# Altium PCB PCB_4_Sensores.PcbDoc
Units mm, origin at the board's own origin, x right, y up, seen from the top; angles counter-clockwise.
Board outline 47 x 141 mm, 2 copper layers (Top Layer, Bottom Layer); 4 components, 78 nets, 74 pads, 37 vias.
Unrouted connection lines stored in the file: 4.
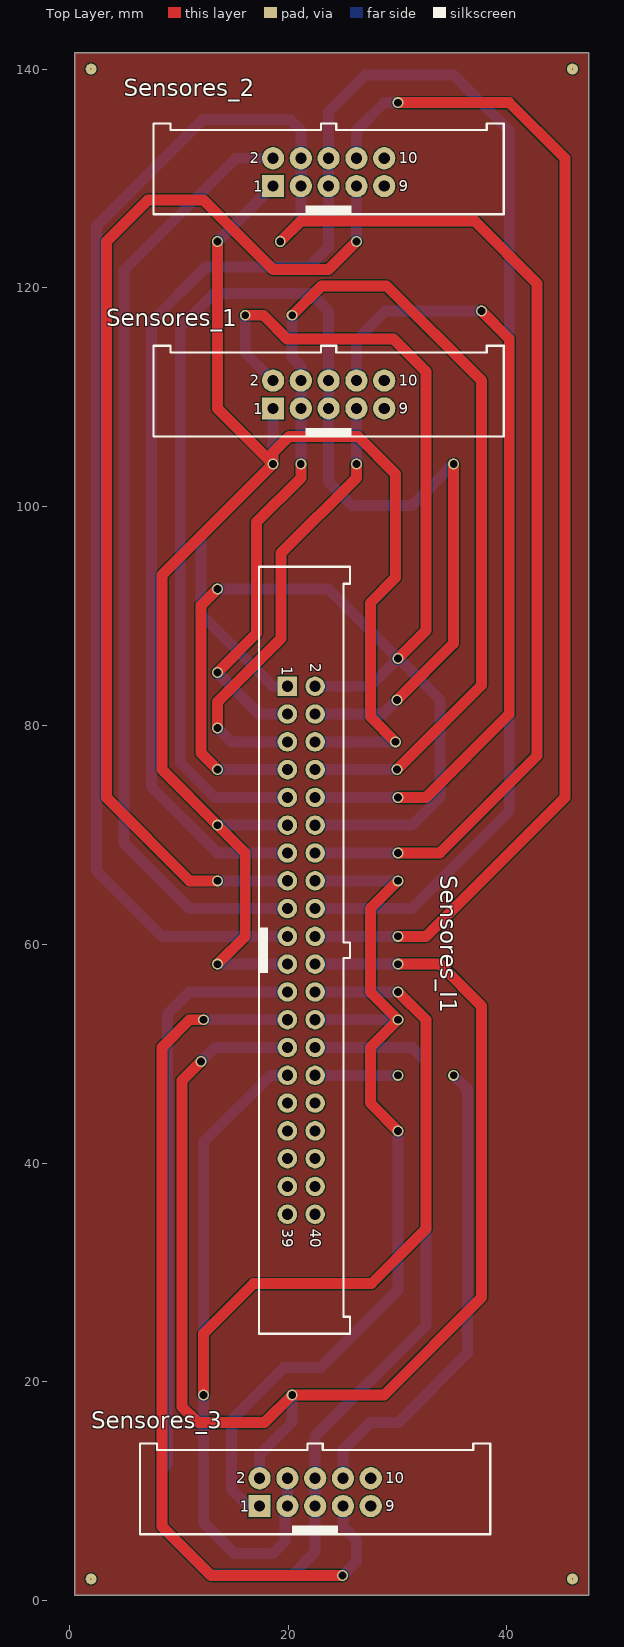
[diagram p0: Top Layer view]
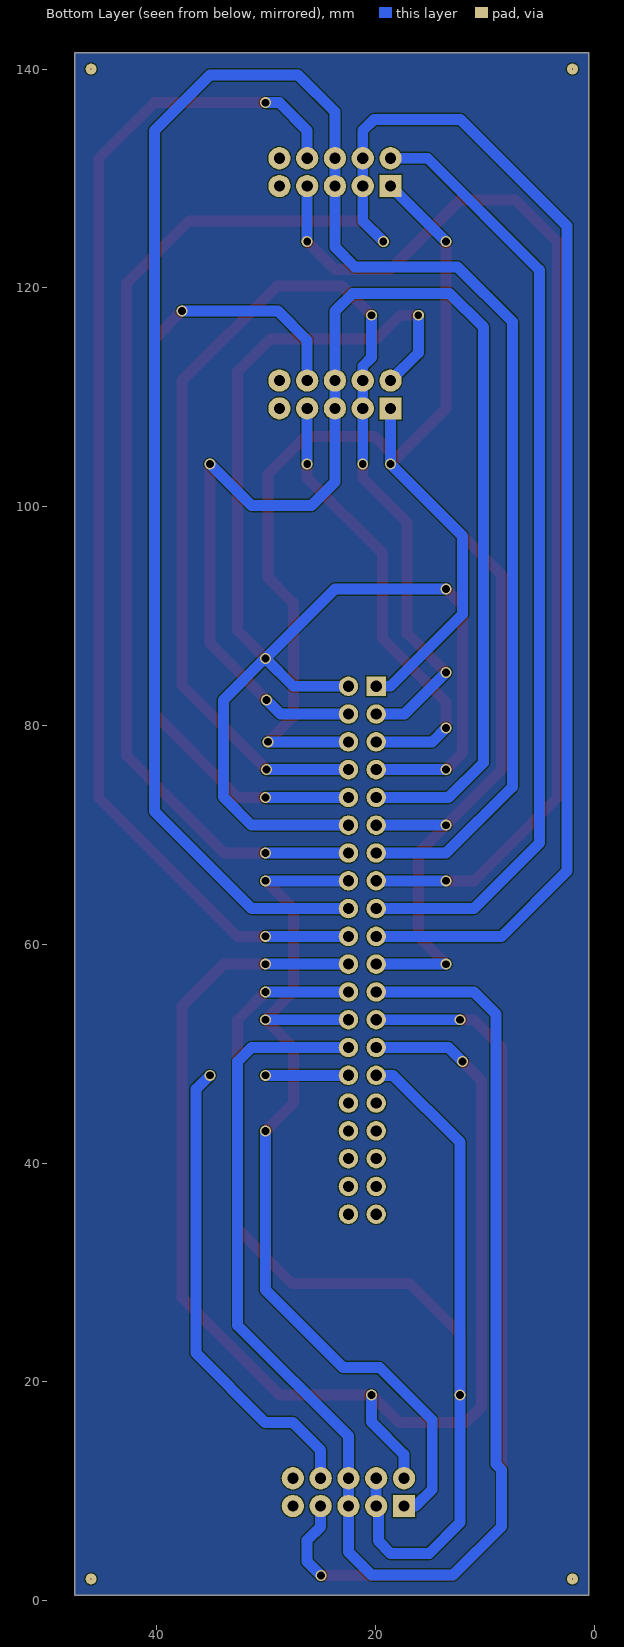
[diagram p1: Bottom Layer view, seen from below]
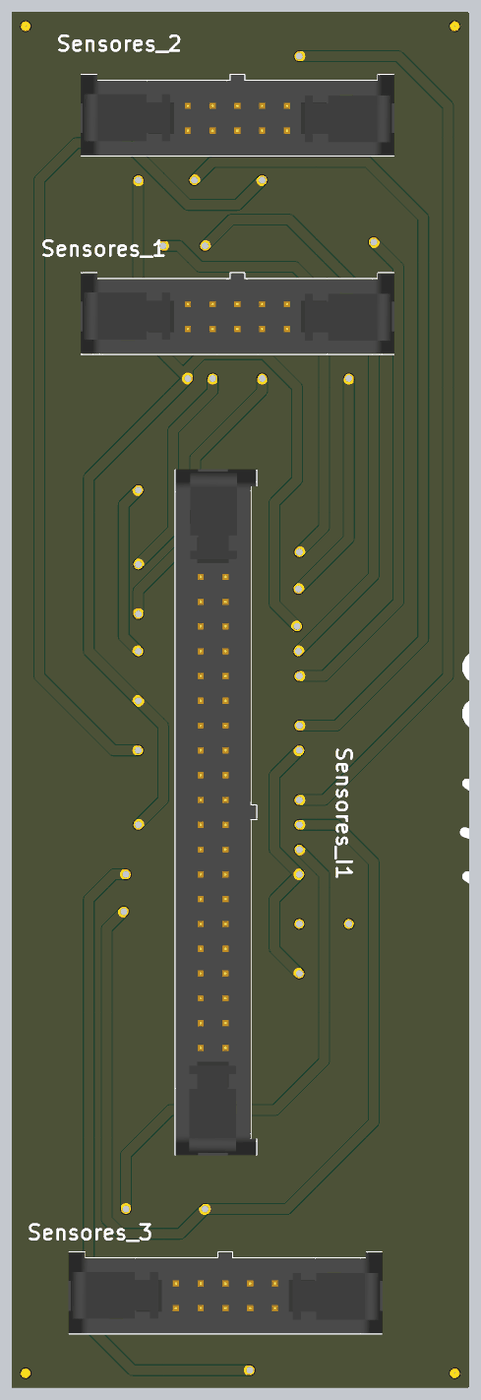
[diagram p2: 3D render of the assembled board from above, using the file's embedded part models]

## Layer stack, top to bottom
Top Solder: solder mask 0.0102, Solder Resist, Dk 3.5
Top Layer: signal copper 0.0356
Dielectric 1: dielectric 0.32, FR-4, Dk 4.8
Bottom Layer: signal copper 0.0356
Bottom Solder: solder mask 0.0102, Solder Resist, Dk 3.5

## Board outline
47.5,141.5 47.5,0.5 0.5,0.5 0.5,141.5

## Design rules (kind name [scope] priority, off if disabled: settings)
Clearance [All] p1: gap=0.254 ignorepadtopadclearanceinfootprint=FALSE except(0: Arc-Hole Track-Hole SMDPad-Hole THPad-Hole Via-Hole Fill-Hole Poly-Hole Region-Hole Text-Hole; 0.1: Arc-Fill Arc-Poly Arc-Region Track-Fill Track-Poly Track-Region SMDPad-Fill SMDPad-Poly SMDPad-Region THPad-Fill THPad-Poly THPad-Region Via-Fill Via-Poly Via-Region Fill-Fill Fill-Poly Fill-Region Poly-Poly Poly-Region Region-Region)
ParallelSegment [All] p1: limit=800.217 gap=0.25
PlaneClearance [All] p1: clearance=0.01
PolygonConnect [All] p1: connectstyle=Relief reliefconductorwidth=0.254 reliefentries=4 polygonreliefangle="90 Angle" airgapwidth=0.254
RoutingCorners [All] p1: cornerstyle=45-Degree minsetback=5.08 maxsetback=2.54
RoutingPriority [OnLayer('Bottom Layer')] p1: routingpriority=6
RoutingVias [All] p1: holewidth=0.711 width=1.57 viastyle="Through Hole" minholewidth=0.5 minwidth=1 maxholewidth=0.711 maxwidth=1.67
SolderMaskExpansion [All] p1: expansion=0.102
UnRoutedNet [All] p1: checkbadconnections=TRUE
Width "Schematic Width Constraint_9" [InNet('GND_8V')] p1: maxlimit=1.27 minlimit=1.27 preferedwidth=1.27
Width "Schematic Width Constraint_7" [InNet('Servo_5')] p2: maxlimit=0.762 minlimit=0.762 preferedwidth=0.762
Width "Schematic Width Constraint_6" [InNet('Servo_7')] p3: maxlimit=0.762 minlimit=0.762 preferedwidth=0.762
Width "Schematic Width Constraint_5" [InNet('Servo_8')] p4: maxlimit=0.762 minlimit=0.762 preferedwidth=0.762
Width "Schematic Width Constraint_4" [InNet('Servo_6')] p5: maxlimit=0.762 minlimit=0.762 preferedwidth=0.762
Width "Schematic Width Constraint_3" [InNet('Servo_2')] p6: maxlimit=0.762 minlimit=0.762 preferedwidth=0.762
Width "Schematic Width Constraint_2" [InNet('Servo_4')] p7: maxlimit=0.762 minlimit=0.762 preferedwidth=0.762
Width "Schematic Width Constraint_1" [InNet('Servo_3')] p8: maxlimit=0.762 minlimit=0.762 preferedwidth=0.762
Width "Schematic Width Constraint_8" [InNet('Servo_1')] p9: maxlimit=0.762 minlimit=0.762 preferedwidth=0.762
Width "Schematic Width Constraint" [InNet('VCC_8V')] p10: maxlimit=1.524 minlimit=1.27 preferedwidth=1.524
Width [All] p11: maxlimit=1 minlimit=0.2 preferedwidth=1 minimp=50.000000 maximp=50.000000 favimp=50.000000
26 further rules are at their usual default settings.

## Components (designator, comment, footprint, x,y, rotation, side; value= is the part's Value field where it differs from the comment)
Sensores_1 "61201022021" 61201022021 23.71,110.26 r0 top
Sensores_2 "61201022021" 61201022021 23.71,130.58 r0 top
Sensores_3 "61201022021" 61201022021 22.48,9.93 r0 top
Sensores_I1 "61204022021" 61204022021 21.21,59.46 r270 top

## Footprints (in the part's own frame and the unit in brackets; to place one, negate y for a bottom-side part, rotate by r counter-clockwise, add the part's x,y. Pads: shape width x height; smd on the part's side, far side on the other; paste and mask are expansions set on the pad)
61201022021 [mil] "10 pins, straight, short lever, gold plating"
  rect 80x80 hole 40.16: 1(-200,-50)
  round 80 hole 40.16: 2(-200,50) 3(-100,-50) 4(-100,50) 5(0,-50) 6(0,50) 7(100,-50) 8(100,50) 9(200,-50) 10(200,50)
  silkscreen extent -630,-152 630,175, body extent -634,-152 634,175, height 967
61204022021 [mil] "40 pins, straight, short lever, gold plating"
  rect 70x70 hole 40.16: 1(-950,-50)
  round 70 hole 40.16: 2(-950,50) 3(-850,-50) 4(-850,50) 5(-750,-50) 6(-750,50) 7(-650,-50) 8(-650,50) 9(-550,-50) 10(-550,50) 11(-450,-50) 12(-450,50) 13(-350,-50) 14(-350,50) 15(-250,-50) 16(-250,50) 17(-150,-50) 18(-150,50) 19(-50,-50) 20(-50,50) 21(50,-50) 22(50,50) 23(150,-50) 24(150,50) 25(250,-50) 26(250,50) 27(350,-50) 28(350,50) 29(450,-50) 30(450,50) 31(550,-50) 32(550,50) 33(650,-50) 34(650,50) 35(750,-50) 36(750,50) 37(850,-50) 38(850,50) 39(950,-50) 40(950,50)
  silkscreen extent -1380,-152 1380,175, body extent -1384,-152 1384,175, height 967

## Part data
Sensores_1 Sensores_2 Sensores_3: "Male Box Header WR-BHD with lever, THT, Vertical, pitch 2.54 mm, 10 pins", Contact Resistance="20 mOhm", Operating Temperature="-40 to 125 degC", Withstanding Voltage="500 VAC", Working Voltage="250 VAC", ComponentLink1Description=Manufacturer, ComponentLink1URL=http://www.we-online.de, ComponentLink2Description=Datasheet, ComponentLink2URL=https://katalog.we-online.de/em/datasheet/6120xx22021.pdf, Gender=Male, Mounting Technology=THT, Orientation=Vertical, Packaging=Tray, Part Number=61201022021, Pin Number=10, Pitch="2.54 mm", Published Date="August 2018", Publisher="Wurth Elektronik"
Sensores_I1: "Male Box Header WR-BHD with lever, THT, Vertical, pitch 2.54 mm, 40 pins", Contact Resistance="20 mOhm", Operating Temperature="-40 to 125 degC", Withstanding Voltage="500 VAC", Working Voltage="250 VAC", ComponentLink1Description=Manufacturer, ComponentLink1URL=http://www.we-online.de, ComponentLink2Description=Datasheet, ComponentLink2URL=https://katalog.we-online.de/em/datasheet/6120xx22021.pdf, Gender=Male, Mounting Technology=THT, Orientation=Vertical, Packaging=Tray, Part Number=61204022021, Pin Number=40, Pitch="2.54 mm", Published Date="August 2018", Publisher="Wurth Elektronik"

## Free pads (board coordinates)
  round 1 hole 0.1: 1(2,2) 1(2,140) 1(46,2) 1(46,140)

## Via types
v1: diameter 1, hole 0.711, Top Layer to Bottom Layer, 37 vias

## Nets (pads, with @x,y where several pads share a name; then routed paths per layer and width w, separated by ;. In a path a pad name is that pad's centre, name@x,y a point inside that pad or via, vN(x,y) a via of type N, cw(c..) or ccw(c..) an arc to the next point about the centre after c; other vN are vias at no path point)
3V3_uC: 
"ADD 1": Sensores_1.7 Sensores_I1.5 | length 41.3
  Top Layer w1: v1(13.55,79.78) 13.55,82.14 19.37,87.96 19.37,95.76 26.25,102.64 v1(26.25,103.91)
  Bottom Layer w1: v1(13.55,79.78) 14.82,78.51 Sensores_I1.5@19.9,78.51 ; v1(26.25,103.91) Sensores_1.7
"ADD 2": Sensores_1.8 Sensores_I1.10 | length 75
  Top Layer w1: v1(30.06,73.43) 32.6,73.43 40.22,81.05 40.22,115.34 v1(37.68,117.88)
  Bottom Layer w1: Sensores_I1.10@22.44,73.43 v1(30.06,73.43) ; Sensores_1.8 26.25,115.213 28.917,117.88 v1(37.68,117.88)
"ADD 3": Sensores_2.7 Sensores_I1.15 | length 103.7
  Top Layer w1: v1(13.55,65.81) 11.01,65.81 3.39,73.43 3.39,124.23 7.2,128.04 12.28,128.04 18.63,121.69 23.71,121.69 v1(26.25,124.23)
  Bottom Layer w1: v1(13.55,65.81) Sensores_I1.15 ; v1(26.25,124.23) Sensores_2.7
"ADD 4": Sensores_2.8 Sensores_I1.20 | length 111.2
  Top Layer w1: v1(30.06,60.73) 32.6,60.73 45.3,73.43 45.3,131.85 40.22,136.93 v1(30.06,136.93)
  Bottom Layer w1: Sensores_I1.20 v1(30.06,60.73) ; Sensores_2.8 26.25,134.39 28.79,136.93 v1(30.06,136.93)
"ADD 5": Sensores_3.7 Sensores_I1.25 | length 82
  Top Layer w1: v1(12.28,53.11) 11.01,53.11 8.47,50.57 8.47,6.795 12.955,2.31 v1(24.98,2.31)
  Bottom Layer w1: v1(12.28,53.11) Sensores_I1.25@19.899,53.11 ; Sensores_I1.25 Sensores_I1.25 ; v1(24.98,2.31) 26.25,3.58 26.25,5.53 25.02,6.76 Sensores_3.7
"ADD 6": Sensores_3.8 Sensores_I1.30 | length 51.2
  Bottom Layer w1: Sensores_I1.30@22.44,48.03 Sensores_I1.30 v1(30.06,48.03) ; Sensores_3.8 25.02,13.78 27.55,16.31 30.09,16.31 36.41,22.63 36.41,46.76 v1(35.14,48.03)
DBG0: 
DBG1: 
DBG2: 
"GND (SENSOR)": Sensores_1.2 Sensores_2.2 Sensores_3.2 Sensores_I1.2 Sensores_I1.7 Sensores_I1.12 Sensores_I1.17 Sensores_I1.22 Sensores_I1.27 | length 344.9
  Top Layer w1: v1(12.051,49.3) 10.318,47.566 10.318,17.727 11.765,16.28 17.84,16.28 v1(20.38,18.82) 28.79,18.82 37.68,27.71 37.68,54.38 33.87,58.19 v1(30.06,58.19) ; v1(13.55,75.97) 13.55,75.989 12.05,77.489 12.05,90.98 v1(13.55,92.48) ; v1(16.09,117.5) 17.74,117.5 19.9,115.34 29.63,115.34 32.6,112.37 32.6,88.67 v1(30.06,86.13)
  Bottom Layer w1: v1(12.051,49.3) 13.321,50.57 Sensores_I1.27@19.899,50.57 ; v1(13.55,75.97) Sensores_I1.7@19.899,75.97 ; v1(13.55,92.48) 23.71,92.48 v1(30.06,86.13) ; v1(16.09,117.5) 16.09,114.07 Sensores_1.2 ; Sensores_3.2 17.4,13.35 20.38,16.33 v1(20.38,18.82) ; Sensores_2.2 15.23,131.85 5,121.62 5,69.28 11.01,63.27 Sensores_I1.17 ; Sensores_I1.27 Sensores_I1.27 ; Sensores_I1.7 Sensores_I1.7 ; Sensores_I1.22 v1(30.06,58.19) ; Sensores_I1.12 31.33,70.89 33.91,73.47 33.91,82.345 30.125,86.13 v1(30.06,86.13) ; Sensores_I1.2 27.52,83.59 v1(30.06,86.13)
GND_8V: 
GND_uC: 
I2C1-SCL: Sensores_1.3 Sensores_1.4 Sensores_I1.3 Sensores_I1.8 | length 112.3
  Top Layer w1: v1(13.55,84.86) 17.12,88.43 17.12,98.59 21.17,102.64 v1(21.17,103.91) ; v1(20.38,117.5) 23.07,120.19 29.02,120.19 37.68,111.53 37.68,83.681 v1(29.969,75.97)
  Bottom Layer w1: v1(13.55,84.86) 17.36,81.05 Sensores_I1.3@19.9,81.05 ; v1(20.38,117.5) 20.38,113.63 21.17,112.84 Sensores_1.4 Sensores_1.3 v1(21.17,103.91) ; Sensores_I1.8@22.44,75.97 Sensores_I1.8 v1(29.969,75.97)
I2C1-SDA: Sensores_1.5 Sensores_1.6 Sensores_I1.4 Sensores_I1.9 | length 127.7
  Top Layer w1: v1(29.969,82.345) 35.14,87.516 v1(35.14,103.91)
  Bottom Layer w1: Sensores_I1.9@19.9,73.43 13.32,73.43 10.15,76.6 10.15,116.42 13.23,119.5 22.09,119.5 23.71,117.88 Sensores_1.6 Sensores_1.5 23.71,102.25 25.86,100.1 31.33,100.1 v1(35.14,103.91) ; Sensores_I1.4@22.44,81.05 Sensores_I1.4 28.674,81.05 v1(29.969,82.345)
I2C2-SCL: Sensores_2.5 Sensores_2.6 Sensores_I1.13 Sensores_I1.18 | length 192.5
  Bottom Layer w1: Sensores_I1.13 13.55,68.35 7.5,74.4 7.5,116.91 12.51,121.92 21.9,121.92 23.71,123.73 Sensores_2.5 Sensores_2.6 23.71,136.1 27.08,139.47 35.14,139.47 40.22,134.39 40.22,72.16 31.33,63.27 Sensores_I1.18
I2C2-SDA: Sensores_2.3 Sensores_2.4 Sensores_I1.14 Sensores_I1.19 | length 206.7
  Top Layer w1: v1(19.29,124.23) 21.17,126.11 37.07,126.11 42.76,120.42 42.76,77.24 33.87,68.35 v1(30.06,68.35)
  Bottom Layer w1: v1(19.29,124.23) 21.17,126.11 Sensores_2.3 Sensores_2.4 21.17,134.39 20.16,135.4 12.23,135.4 2.5,125.67 2.5,66.7 8.47,60.73 Sensores_I1.19 ; Sensores_I1.14 v1(30.06,68.35)
I2C3-SCL: Sensores_3.5 Sensores_3.6 Sensores_I1.23 Sensores_I1.28 | length 135.2
  Bottom Layer w1: Sensores_I1.23@19.899,55.65 11.01,55.65 9,53.64 9,12.492 8.47,11.962 8.47,6.795 12.915,2.35 20.38,2.35 22.48,4.45 Sensores_3.5 Sensores_3.6 22.48,15.05 32.6,25.17 32.6,49.3 31.33,50.57 Sensores_I1.28 Sensores_I1.28@22.44,50.57 ; Sensores_I1.23 Sensores_I1.23
I2C3-SDA: Sensores_3.3 Sensores_3.4 Sensores_I1.24 Sensores_I1.29 | length 120.1
  Top Layer w1: v1(12.28,18.82) 12.28,24.41 16.85,28.98 27.61,28.98 32.6,33.97 32.6,53.11 v1(30.06,55.65)
  Bottom Layer w1: Sensores_I1.29@19.9,48.03 19.899,48.029 18.389,48.029 12.28,41.92 v1(12.28,18.82) 12.28,7.15 15.095,4.335 18.63,4.335 19.743,5.447 19.743,8.463 Sensores_3.3 Sensores_3.4 ; Sensores_I1.24@22.44,55.65 Sensores_I1.24 v1(30.06,55.65)
NetQ1_1: 
NetQ1_2: 
NetQ2_1: 
NetQ2_2: 
NetQ3_1: 
NetQ3_2: 
NetQ4_1: 
NetQ4_2: 
NetQ5_1: 
NetQ5_2: 
NetQ6_1: 
NetQ6_2: 
NetQ7_1: 
NetQ7_2: 
NetQ8_1: 
NetQ8_2: 
NetR1_1: 
NetR2_1: 
NetR3_1: 
NetR4_1: 
NetR9_1: 
NetR10_1: 
NetR11_1: 
NetR12_1: 
NetR17_1: 
NetR18_1: 
NetR19_1: 
NetR20_1: 
NetR25_1: 
NetR26_1: 
NetR27_1: 
NetR28_1: 
PWM_Servo_1: 
PWM_Servo_2: 
PWM_Servo_3: 
PWM_Servo_4: 
PWM_Servo_5: 
PWM_Servo_6: 
PWM_Servo_7: 
PWM_Servo_8: 
Sensor_Servo_1: 
Sensor_Servo_2: 
Sensor_Servo_3: 
Sensor_Servo_4: 
Sensor_Servo_5: 
Sensor_Servo_6: 
Sensor_Servo_7: 
Sensor_Servo_8: 
Servo_1: 
Servo_2: 
Servo_3: 
Servo_4: 
Servo_5: 
Servo_6: 
Servo_7: 
Servo_8: 
"VCC  (SENSOR)": Sensores_1.1 Sensores_2.1 Sensores_3.1 Sensores_I1.1 Sensores_I1.6 Sensores_I1.11 Sensores_I1.16 Sensores_I1.21 Sensores_I1.26 | length 263.2
  Top Layer w1: v1(13.55,58.19) 16.09,60.73 16.09,68.35 v1(13.55,70.89) 8.47,75.97 8.47,93.75 v1(18.63,103.91) ; v1(13.55,124.23) 13.55,108.99 v1(18.63,103.91) ; v1(29.83,78.51) 27.52,80.82 27.52,91.21 29.83,93.52 29.83,102.997 26.417,106.41 20.1,106.41 18.63,104.94 v1(18.63,103.91) ; v1(30.06,42.95) 27.52,45.49 27.52,50.57 v1(30.06,53.11) 27.52,55.65 27.52,63.27 v1(30.06,65.81)
  Bottom Layer w1: v1(13.55,58.19) Sensores_I1.21 ; v1(13.55,70.89) Sensores_I1.11 ; v1(13.55,124.23) Sensores_2.1 ; Sensores_3.1 16.34,8.66 14.82,10.18 14.82,16.521 19.619,21.32 22.98,21.32 30.06,28.4 v1(30.06,42.95) ; Sensores_1.1 v1(18.63,103.91) 12.05,97.33 12.05,90.17 18.63,83.59 Sensores_I1.1@19.899,83.59 ; Sensores_I1.1 Sensores_I1.1 ; Sensores_I1.26@22.44,53.11 Sensores_I1.26 v1(30.06,53.11) ; Sensores_I1.16 v1(30.06,65.81) ; Sensores_I1.6 v1(29.83,78.51)
VCC_8V: 
VCC_uC: 
pads on no net: Sensores_1.9 Sensores_1.10 Sensores_2.9 Sensores_2.10 Sensores_3.9 Sensores_3.10 Sensores_I1.31 Sensores_I1.32 Sensores_I1.33 Sensores_I1.34 Sensores_I1.35 Sensores_I1.36 Sensores_I1.37 Sensores_I1.38 Sensores_I1.39 Sensores_I1.40

## Polygon pours and split planes (outlines as drawn)
no net on My_Negative_Layer (solid): 0.5,0.5 47.5,0.5 47.5,141.5 0.5,141.5
no net on Bottom Layer "Bottom Layer-No Net" (solid, pour order 14): 0.5,0.5 47.5,0.5 47.5,141.5 0.5,141.5
no net on Top Layer "Top Layer-No Net" (solid, pour order 16): 0.5,0.5 47.5,0.5 47.5,141.5 0.5,141.5

## Dimensions
0.5,141.5 to 47.5,141.5 on Top Overlay
47.5,141.5 to 47.5,0.5 on Top Overlay

## Text inside footprints (layer, text, board x,y; h text height)
Sensores_1: Top Overlay "9" at 30.11,108.52 h1.02; Top Overlay "1" at 16.81,108.46 h1.02; Top Overlay "10" at 30.11,111.06 h1.02; Top Overlay "2" at 16.51,111.06 h1.02
Sensores_2: Top Overlay "9" at 30.11,128.84 h1.02; Top Overlay "1" at 16.81,128.78 h1.02; Top Overlay "10" at 30.11,131.38 h1.02; Top Overlay "2" at 16.51,131.38 h1.02
Sensores_3: Top Overlay "9" at 28.88,8.19 h1.02; Top Overlay "1" at 15.58,8.13 h1.02; Top Overlay "10" at 28.88,10.73 h1.02; Top Overlay "2" at 15.28,10.73 h1.02
Sensores_I1: Top Overlay "39" at 19.47,34.01 h1.02 r270; Top Overlay "40" at 22.01,34.01 h1.02 r270; Top Overlay "2" at 22.01,85.71 h1.02 r270; Top Overlay "1" at 19.41,85.41 h1.02 r270